# Altium PCB Buck_Converter_PCB.PcbDoc
Units mil, origin at the board's own origin, x right, y up, seen from the top; angles counter-clockwise.
Board outline 2500.42 x 886.25 mil, 2 copper layers (Top Layer, Bottom Side); 16 components, 11 nets, 44 pads, 0 vias.
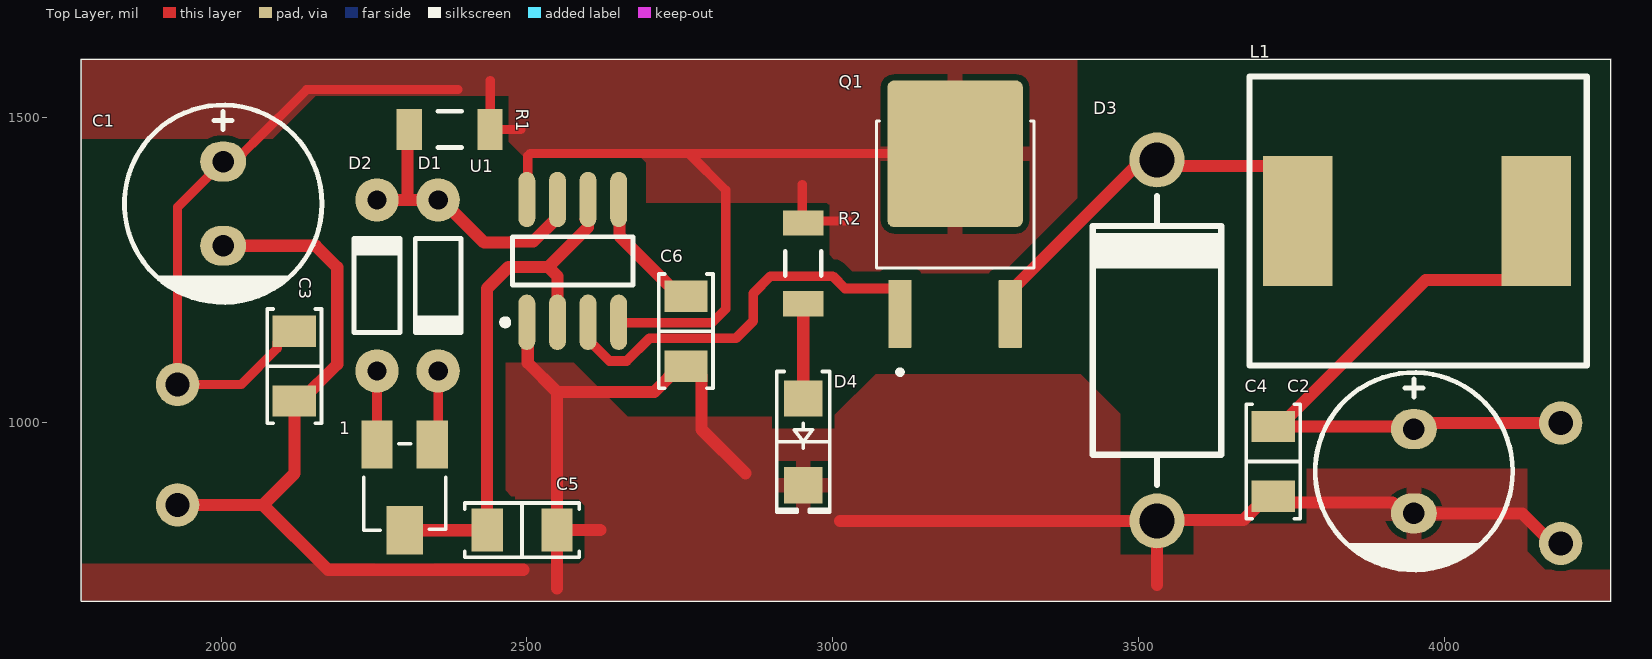
[diagram p0: Top Layer view]
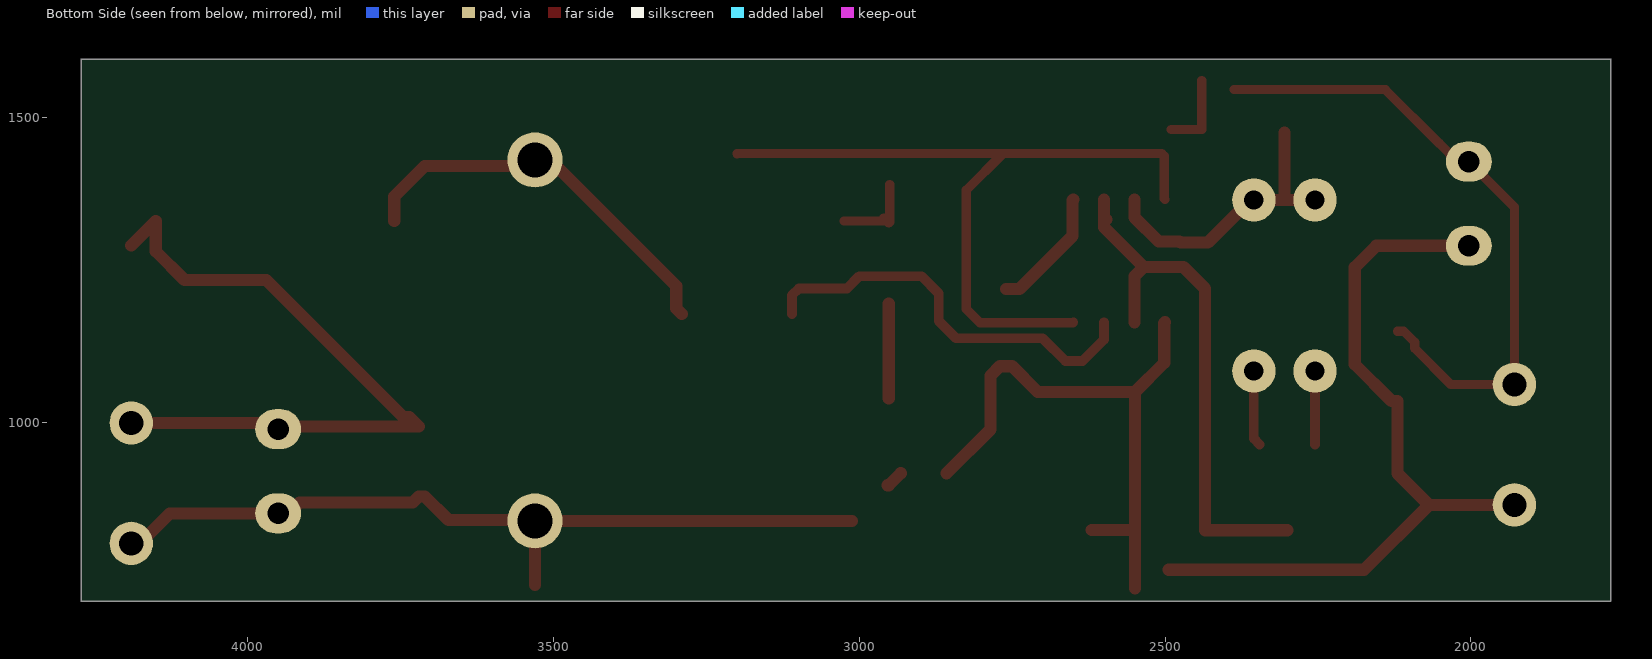
[diagram p1: Bottom Side view, seen from below]
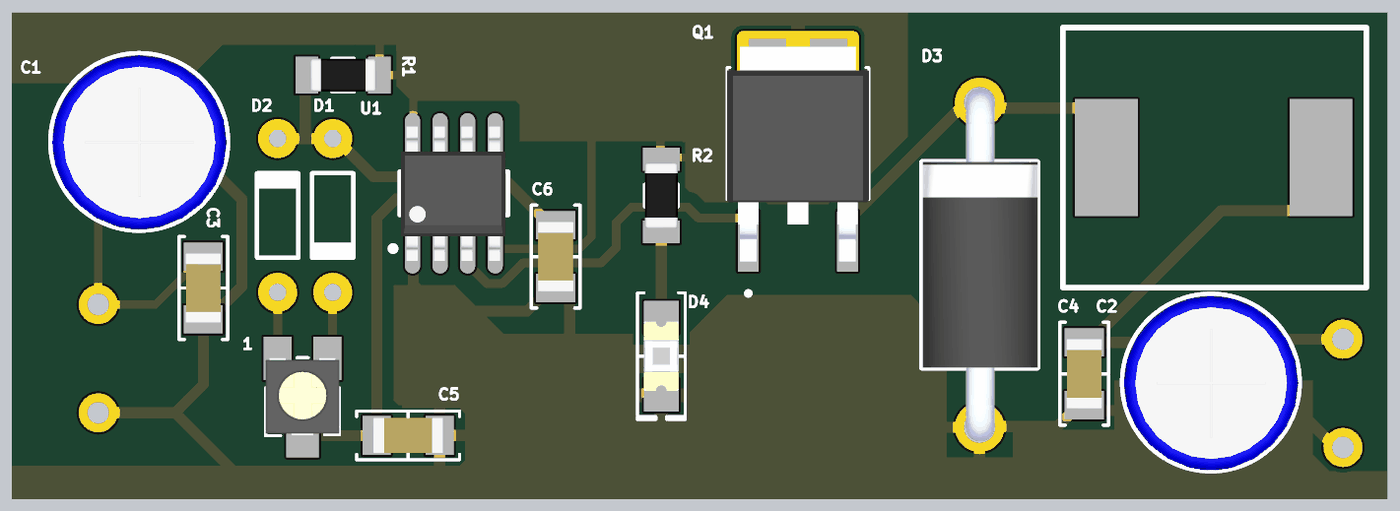
[diagram p2: 3D render of the assembled board from above, using the file's embedded part models]

## Layer stack, top to bottom
Top Solder: solder mask 0.4, Solder Resist, Dk 3.5
Top Layer: signal copper 1.4
Dielectric 1: dielectric 12.6, FR-4, Dk 4.8
Bottom Side: signal copper (thickness not stored)

## Board outline
1771.65,708.45 4271.65,708.45 4271.87,708.66 4271.87,1594.49 4271.65,1594.7 1771.65,1594.7 1771.44,1594.49

## Design rules (kind name [scope] priority, off if disabled: settings)
Clearance [All] p1: gap=10 ignorepadtopadclearanceinfootprint=FALSE except(20: Arc-Poly Track-Poly SMDPad-Poly THPad-Poly Via-Poly Fill-Poly Poly-Poly Poly-Region Poly-Text Poly-Hole)
DiffPairsRouting [All] p1: maxlimit=10 minlimit=10 mostfreqgap=10 substack1={3B3013A1-29BA-4362-BCA9-CDB0604C5A70} toplayer_{3b3013a1-29ba-4362-bca9-cdb0604c5a70}_minwidth=15 toplayer_{3b3013a1-29ba-4362-bca9-cdb0604c5a70}_maxwidth=15 toplayer_{3b3013a1-29ba-4362-bca9-cdb0604c5a70}_prefwidth=15 bottomlayer_{3b3013a1-29ba-4362-bca9-cdb0604c5a70}_minwidth=15 bottomlayer_{3b3013a1-29ba-4362-bca9-cdb0604c5a70}_maxwidth=15 bottomlayer_{3b3013a1-29ba-4362-bca9-cdb0604c5a70}_prefwidth=15 toplayer_minwidth=15 toplayer_maxwidth=15 toplayer_prefwidth=15 bottomlayer_minwidth=15 bottomlayer_maxwidth=15 bottomlayer_prefwidth=15 maxuncoupledlength=500
PolygonConnect [All] p1: connectstyle=Relief reliefconductorwidth=25 reliefentries=4 polygonreliefangle="90 Angle" airgapwidth=10
RoutingVias [All] p1: holewidth=28 width=50 viastyle="Through Hole" minholewidth=28 minwidth=50 maxholewidth=28 maxwidth=50
SolderMaskExpansion [All] p1: expansion=4 istentingtop=FALSE
SupplyNets "Schematic Supply Nets_1" [InNet('+12V')] p1: voltage=0.000
SupplyNets "Schematic Supply Nets_3" [InNet('+OUT')] p2: voltage=0.000
SupplyNets "Schematic Supply Nets" [InNet('GND')] p3: voltage=0.000
Width [All] p1: maxlimit=10 minlimit=10 preferedwidth=10 substack1={3B3013A1-29BA-4362-BCA9-CDB0604C5A70} toplayer_{3b3013a1-29ba-4362-bca9-cdb0604c5a70}_maxwidth=40 toplayer_{3b3013a1-29ba-4362-bca9-cdb0604c5a70}_prefwidth=20
29 further rules are at their usual default settings.

## Classes and differential pairs
component class Buck_Converter_Sch: 1 C1 C2 C3 C4 C5 C6 D1 D2 D3 L1 Q1 R1 R2 U1

## Components (designator, comment, footprint, x,y, rotation, side; value= is the part's Value field where it differs from the comment)
1 "Value?" "POT4MM-Small Pot" 2300.28,886.26 r270 top
C1 "470u'F, 25'V" "Cap 03" 2003.5,1358.45 r90 top
C2 "470u'F, 25'V" "Cap 03" 3950,921.1 r90 top
C3 "100nF" "CAP 1206/3216" 2120,1092.91 r270 top
C4 "100nF" "CAP 1206/3216" 3720,937.09 r270 top
C5 "10nF" "CAP 1206/3216" 2492.09,825 r0 top
C6 "10nF" "CAP 1206/3216" 2760,1150 r270 top
D1 "1N4148" DO-35 2355,1224.76 r270 top
D2 "1N4148" DO-35 2255,1224.76 r90 top
D3 "1N5822" BYW98 3530,1135 r90 top
D4 "Green, 1206" "LED 1206/3216 GREEN" 2951.81,969.13 r270 top
L1 "220uH" 12x12x10mm_Inductor 3760,1330 r0 top
Q1 "NTD25P03L" TO229P990X238-3N 3200,1341.18 r90 top (schematic designator Q?)
R1 "1k" "RES 1206 (3216X08L)" 2425,1480 r180 top
R2 "1k" "RES 1206 (3216X08L)" 2951.81,1312.05 r270 top
U1 "NE555" SO8_narrow_m 2575,1265 r90 top

## Footprints (in the part's own frame and the unit in brackets; to place one, negate y for a bottom-side part, rotate by r counter-clockwise, add the part's x,y. Pads: shape width x height; smd on the part's side, far side on the other; paste and mask are expansions set on the pad)
12x12x10mm_Inductor [mm]
  rect 2.9x5.4 smd: 0(0,0) 1(9.906,0)
  silkscreen extent -2,-6 12,6
BYW98 [mil]
  round 90 hole 57: 1(-295,0) 2(295,0)
  silkscreen extent -236,-105 236,105, body extent -320,-106 321,103, height 254
"Cap 03" [mil] "diameter: 8'mm"
  oval 65x75 hole 35: 1(68.9,0) 2(-68.9,0)
  silkscreen extent -161,-161 161,161, body extent -159,-159 157,158, height 473
"CAP 1206/3216" [mm] "Chip Capacitor, 2-Leads, Body 3.25x1.60mm, IPC Medium Density"
  rect 1.3x1.8 smd: 1(-1.45,0) 2(1.45,0)
  silkscreen extent -2.37,-1.12 2.37,1.12, body extent -1.6,-0.81 1.6,0.81, height 1.62
DO-35 [mm] "Diode, Axial; Body 3.8 x 1.9 mm (LxDia. max), Lead Dia. 0.53 mm (max)"
  round 1.8 hole 0.8: 1(-3.55,0) 2(3.55,0)
  silkscreen extent -1.95,-0.95 2.05,0.95
"LED 1206/3216 GREEN" [mm] "Chip Diode, 2-Leads, Body 3.13x1.55mm, IPC Medium Density"
  rect 1.5x1.6 smd: 1(-1.8,0) 2(1.8,0)
  silkscreen extent -2.92,-1.1 2.92,1.1, body extent -1.6,-0.8 1.6,0.8, height 0.9
"POT4MM-Small Pot" [mm] "Square Trimming Potentiometer"
  rect 2x1.3 smd: CCW(-2,-1.15) CW(-2,1.15)
  rect 2x1.5 smd: W(1.568,0)
  silkscreen extent -2.03,-1.7 1.57,1.7, body extent -2.03,-1.7 1.57,1.7, height 2
"RES 1206 (3216X08L)" [mm] "Chip Resistor, 2-Leads, Body 3.2x1.6mm, IPC High Density _ (0.125 W)"
  rect 1.05x1.7 smd: 1(-0.377,0) 2(2.973,0)
  silkscreen extent 0.8,-0.75 1.8,0.75, body extent -0.23,-0.76 2.82,0.76, height 0.6
SO8_narrow_m [mm] "8-Pin Small Outline Package (SO8), IPC Low Density"
  oval 2.3x0.7 smd: 1(-2.55,1.905) 2(-2.55,0.635) 3(-2.55,-0.635) 4(-2.55,-1.905) 5(2.55,-1.905) 6(2.55,-0.635) 7(2.55,0.635) 8(2.55,1.905)
  silkscreen extent -2.67,-2.5 1,2.93, body extent -3.12,-2.39 3.07,2.44, height 1.7
TO229P990X238-3N [mm]
  rrect10% 2.83x0.97 smd: 1(-4.14,2.29) 3(-4.14,-2.29)
  rrect10% 6.09x5.63 smd paste-4: 4(2.51,0)
  silkscreen extent -6.65,-3.27 3.87,3.27, body extent -5.08,-3.27 4.83,3.27, height 2.39

## Part data
1: library part Res_Pot_SM, "Square Trimming Potentiometer", Package=Package?, Rating=Rating?, Type=Type?, Validation=NT, Inflow=inflow?
C1 C2: library part Cap_Elec_470u_25, "Electrolit Capacitor", Package=Package?, Rating=Rating?, Type=Type?, Validation=NT, Inflow=470uF
C3 C4 C5 C6: library part Cap_Multi_SMD, "Bipolar ceramic capacitor SMD", Package=Package?, Rating=25V, Type=Type?, Validation=Valid, Inflow=inflow?
D1 D2: library part Semi_Diod_STD_1N4148, "High Conductance Fast Diode", Package=Package?, Rating=Rating?, Type=Type?, Validation=NT, Inflow=1N4148
D3: library part Semi_Diod_Sch_1N5822, "Schottky Rectifiers", Package=Package?, Rating=Rating?, Type=Type?, Validation=NT, Inflow=1N5822
D4: library part Semi_LED_Green_1206, "LED", Package=Package?, Rating=Rating?, Type=Type?, Validation=Valid, Inflow=5247
L1: library part "12x12x10mm Inductor"
R1 R2: library part Res_SMD, "Resistor", Package=Package?, Rating=Rating?, Type=10%, Validation=Valid, Inflow=inflow?
U1: library part IC_Timer_NE555_SMD, "Astable or monostable operation timer", Package=Package?, Rating=Rating?, Type=Type?, Validation=Valid, Inflow=555

## Free pads (board coordinates)
  round 70.87 hole 39.37: 8(1929.13,1062.99) 8(4190,1000) 9(1929.13,866.14) 9(4190,803.15)

## Nets (pads, with @x,y where several pads share a name; then routed paths per layer and width w, separated by ;. In a path a pad name is that pad's centre, name@x,y a point inside that pad or via, vN(x,y) a via of type N, cw(c..) or ccw(c..) an arc to the next point about the centre after c; other vN are vias at no path point)
+12V: C1.1 C3.1 pad.8@1929.13,1062.99 Q1.4 R1.1 R2.1 U1.4 U1.8 | length 2583.5
  Top Layer w15: C3.1 2110.16,1150 2092.07,1131.91 2092.07,1122.07 2032.99,1062.99 1929.13,1062.99 1929.13,1352.98 C1.1 2022.03,1427.35 2052.03,1457.35 2052.35,1457.35 2140,1545 2387.64,1545 ; R1.1@2439.84,1492.8 R1.1 ; 2440,1560 2440,1480.16 R1.1 ; 2490,1480 R1.1 ; U1.8 2501.45,1366.84 2501.45,1436.45 ; 2505.59,1440.59 2765,1440.59 ; U1.4 2650.61,1164 2802.68,1164 2825,1186.31 2825,1380.59 2765,1440.59 ; 2950,1390 2950,1328.7 R2.1 ; R2.1@2959.92,1335 R2.1 ; 3025,1330 2954.92,1330 R2.1 ; Q1.4 3199.41,1440.59 2765,1440.59
+OUT: C2.1 C4.1 L1.1 pad.8@4190,1000 | length 1130.4
  Top Layer w20: pad.8@4190,1000 3977.18,1000 3967.18,990 C2.1 3945.83,994.17 C4.1 3735.59,1009.76 3745.43,1009.76 3969.37,1233.7 4102.91,1233.7 4150,1280.79 L1.1 L1.1@4190,1290
DISC: D1.1 D2.2 R1.2 U1.7 | length 480.7
  Top Layer w20: D2.2 2305,1364.53 ; R1.2@2305,1475 2305,1364.53 ; U1.7 2550,1335.94 2510.57,1296.51 2476.36,1296.51 2474.85,1295 2430.15,1295 2360.62,1364.53 D1.1 2305,1364.53
GND: C1.2 C2.2 C3.2 C4.2 C5.2 C6.2 D3.1 D4.2 pad.9 U1.1 | length 3590.7
  Top Layer w20: pad.9@1929.13,866.14 2068.86,866.14 ; C1.2 2154.85,1289.56 2190,1254.41 2190,1095.98 2129.84,1035.83 C3.2 2120,917.28 2068.86,866.14 ; 2494.02,760 2175,760 2068.86,866.14 ; U1.1 2501.45,1163.16 2501.45,1098.55 2549.17,1050.83 ; 2549.17,729.54 C5.2 ; 2620,825 C5.2 ; 2857.2,917.8 2785.43,989.57 2785.43,1077.32 2769.84,1092.91 2750.16,1092.91 2708.07,1050.83 2549.17,1050.83 ; D4.2@2932.28,917.8 D4.2 D4.2@2953.78,898.27 ; 3012.05,840 D3.1 ; 3530,735 D3.1 ; pad.9@4190,803.15 4176.24,803.15 4127.18,852.2 C2.2 3932.82,852.2 3915.03,870 3730,870 C4.2 3710.16,880 3671.42,841.26 3531.26,841.26 D3.1 ; C5.2 2549.17,1050.83
Net1_CCW: 1.CCW D2.1 | length 120
  Top Layer w16: 1.CCW D2.1
Net1_CW: 1.CW D1.2 | length 123.9
  Top Layer w16: 1.CW 2355,974.45 D1.2
NetC6_1: C6.1 U1.5 | length 204.6
  Top Layer w20: U1.5 2651.45,1363.95 2651.45,1305.8 2738.07,1219.17 C6.1@2760,1219.17
NetD3_2: D3.2 L1.0 Q1.3 | length 660.7
  Top Layer w20: Q1.3 3299.25,1187.28 3299.25,1223.9 3491.96,1416.61 3516.61,1416.61 D3.2 3540,1420 3710.41,1420 3760,1370.41 L1.0
NetD4_1: D4.1 R2.2 | length 155
  Top Layer w20: D4.1 R2.2
PWM_OUT: Q1.1 U1.3 | length 680.2
  Top Layer w16: U1.3 2600,1136.24 2634.91,1101.33 2663.16,1101.33 2700.33,1138.5 2841.88,1138.5 2870,1166.61 2870,1211.88 2898.12,1240 3000,1240 3020,1220 3098.75,1220 3109.84,1208.91 Q1.1
THR: 1.W C5.1 U1.2 U1.6 | length 883.4
  Top Layer w20: 1.W 2434.53,824.53 C5.1 2435,1219.85 2470.15,1255 2535,1255 ; U1.2 2550,1240 2535,1255 ; U1.6@2596.33,1332.45 2596.51,1332.45 U1.6@2600,1335.94 ; U1.6 2600,1320 2535,1255

## Polygon pours and split planes (outlines as drawn)
GND on Top Layer "NONET_L-01_P-001" (solid, pour order 1): 4270,708.45 4270,760 4165,760 4135,790 4135,925 3775,925 3775,835 3590,835 3590,785 3470,785 3470,1015 3405,1080 3070,1080 3000,1010 2665,1010 2576.45,1098.55 2465,1098.55 2465,890 2480,875 2585,875 2595,865 2595,780 2585,770 1771.65,770 1771.65,708.45
+12V on Top Layer "NONET_L-01_P-001" (solid, pour order 0): 1771.44,1594.49 3400,1594.49 3400,1245 3025,1245 2995,1275 2995,1355 2990,1360 2695,1360 2695,1425 2685,1435 2495,1435 2470,1460 2470,1535 2155,1535 2085,1465 1771.44,1465

## Silkscreen, mask and mechanical layers (free items; w line width, h text height)
Top Overlay:
  lines w0.39: 1771.65,708.66 4271.65,708.66 4271.65,1594.49 1771.65,1594.49 1771.65,708.66